# Altium PCB CPU_wireless_shield_v1.0.PcbDoc
Units mm, origin at the board's own origin, x right, y up, seen from the top; angles counter-clockwise.
Board outline 85 x 56 mm, 2 copper layers (Top Layer, Bottom Layer), stack 1.571 mm thick; 46 components, 34 nets, 177 pads, 0 vias.
Unrouted connection lines stored in the file: 71.
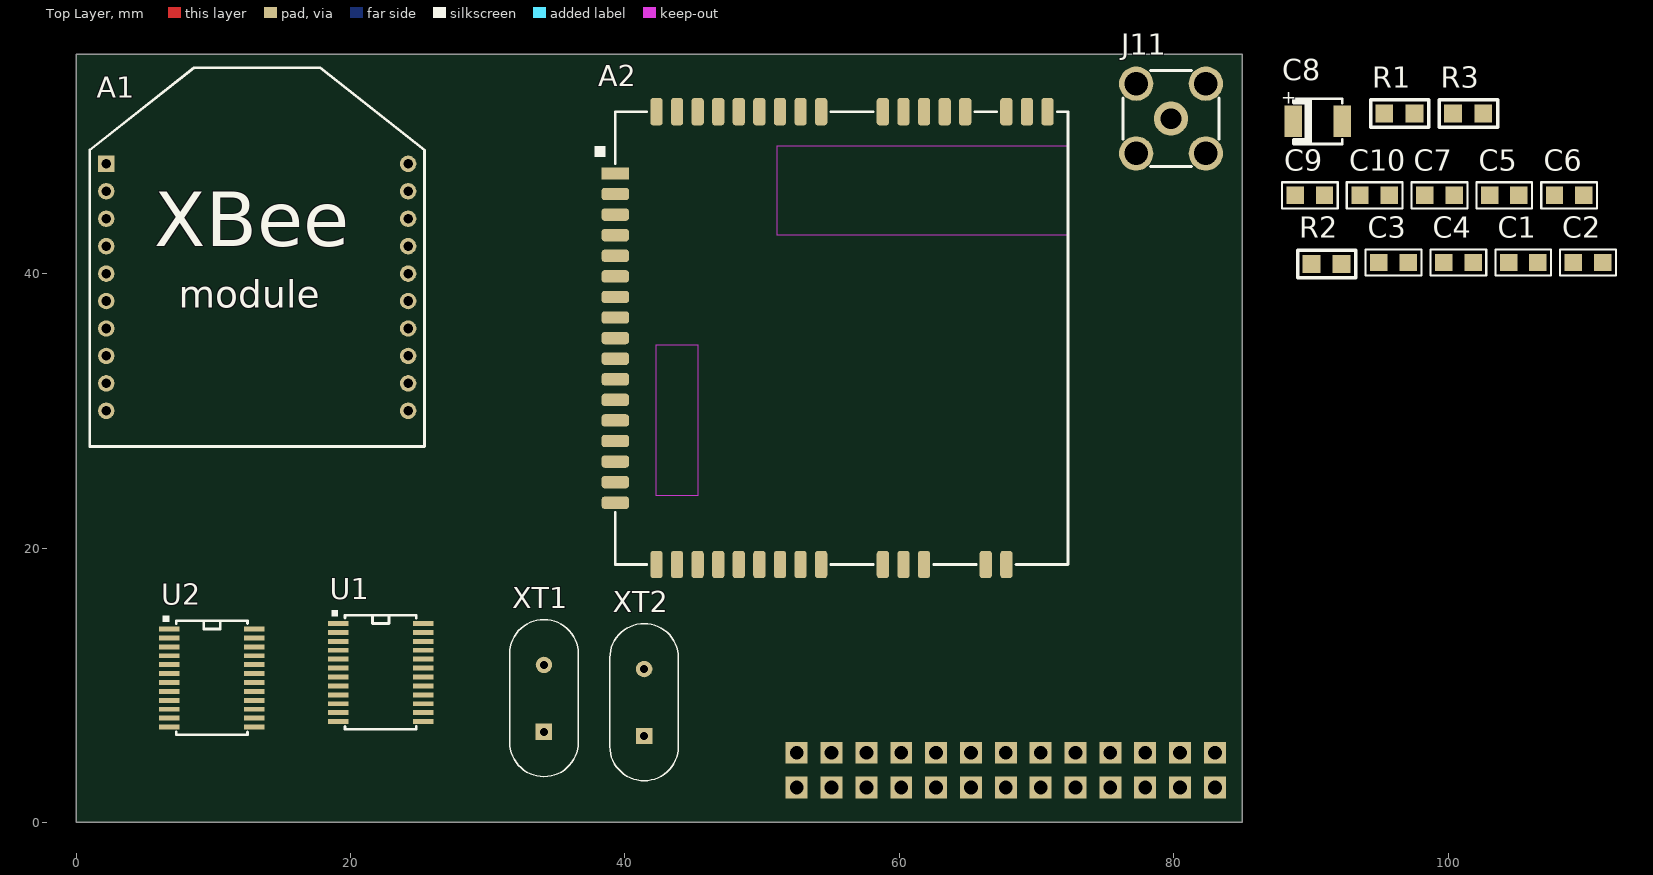
[diagram p0: Top Layer view]
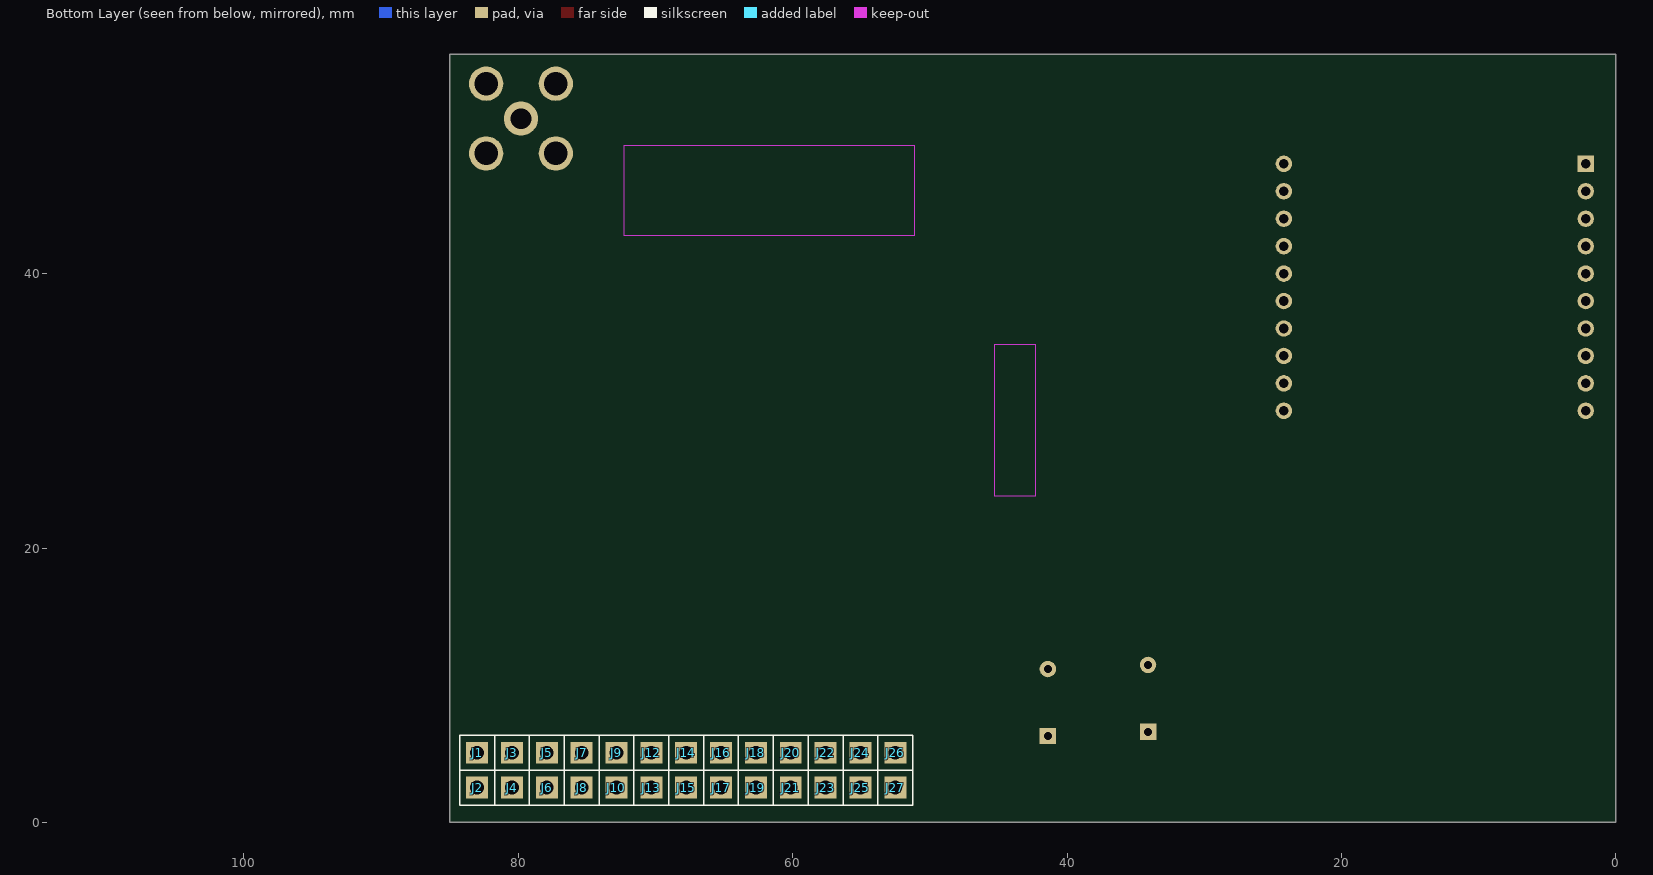
[diagram p1: Bottom Layer view, seen from below]

## Layer stack, top to bottom
Top Layer: signal copper 0.0356
Dielectric: core 1.5, FR-4, Dk 4.8
Bottom Layer: signal copper 0.0356

## Board outline
0,0 0,56 85,56 85,0

## Design rules (kind name [scope] priority, off if disabled: settings)
Clearance [All] p1: gap=0.254
PolygonConnect [All] p1: connectstyle=Relief reliefconductorwidth=0.254 reliefentries=4 polygonreliefangle="90 Angle"
RoutingVias [All] p1: holewidth=0.711 width=1.27 viastyle="Through Hole" minholewidth=0.711 minwidth=1.27 maxholewidth=0.711 maxwidth=1.27
SilkscreenOverComponentPads [All] p1: minsilkscreentomaskgap=0.254
SolderMaskExpansion [All] p1: expansion=0.102
Width [All] p1: maxlimit=0.254 minlimit=0.254 preferedwidth=0.254
27 further rules are at their usual default settings.

## Components (designator, comment, footprint, x,y, rotation, side; value= is the part's Value field where it differs from the comment)
A1 "XBee_RF_module" XBee_module 2.2,48 r0 top
A2 "SIM900D" SIM900D 55.8,35.3 r0 top
C1 "0.1uF" C0805 104.402,40.807 r0 top
C2 "0.1uF" C0805 109.127,40.807 r0 top
C3 "0.1uF" C0805 94.954,40.807 r0 top
C4 "0.1uF" C0805 99.678,40.807 r0 top
C5 "0.1uF" C0805 103.024,45.707 r0 top
C6 "0.1uF" C0805 107.749,45.707 r0 top
C7 "0.1uF" C0805 98.3,45.707 r0 top
C8 "47uF x 10V" SM_C_TANT_B 90.5,51.1 r0 top
C9 "0.1uF" C0805 88.851,45.707 r0 top
C10 "0.1uF" C0805 93.576,45.707 r0 top
J1 "Pin_V2" SOCKET 83,5.08 r180 bottom locked
J2 "Pin_V2" SOCKET 83,2.54 r180 bottom locked
J3 "Pin_V2" SOCKET 80.46,5.08 r180 bottom locked
J4 "Pin_V2" SOCKET 80.46,2.54 r180 bottom locked
J5 "Pin_V2" SOCKET 77.92,5.08 r180 bottom locked
J6 "Pin_V2" SOCKET 77.92,2.54 r180 bottom locked
J7 "Pin_V2" SOCKET 75.38,5.08 r180 bottom locked
J8 "Pin_V2" SOCKET 75.38,2.54 r180 bottom locked
J9 "Pin_V2" SOCKET 72.84,5.08 r180 bottom locked
J10 "Pin_V2" SOCKET 72.84,2.54 r180 bottom locked
J11 "SMA" SMA-J 79.8,51.3 r0 top
J12 "Pin_V2" SOCKET 70.3,5.08 r180 bottom locked
J13 "Pin_V2" SOCKET 70.3,2.54 r180 bottom locked
J14 "Pin_V2" SOCKET 67.76,5.08 r180 bottom locked
J15 "Pin_V2" SOCKET 67.76,2.54 r180 bottom locked
J16 "Pin_V2" SOCKET 65.22,5.08 r180 bottom locked
J17 "Pin_V2" SOCKET 65.22,2.54 r180 bottom locked
J18 "Pin_V2" SOCKET 62.68,5.08 r180 bottom locked
J19 "Pin_V2" SOCKET 62.68,2.54 r180 bottom locked
J20 "Pin_V2" SOCKET 60.14,5.08 r180 bottom locked
J21 "Pin_V2" SOCKET 60.14,2.54 r180 bottom locked
J22 "Pin_V2" SOCKET 57.6,5.08 r180 bottom locked
J23 "Pin_V2" SOCKET 57.6,2.54 r180 bottom locked
J24 "Pin_V2" SOCKET 55.06,5.08 r180 bottom locked
J25 "Pin_V2" SOCKET 55.06,2.54 r180 bottom locked
J26 "Pin_V2" SOCKET 52.52,5.08 r180 bottom locked
J27 "Pin_V2" SOCKET 52.52,2.54 r180 bottom locked
R1 "1k" R0805 95.339,51.657 r0 top
R2 "10k" R0805 90.027,40.709 r0 top
R3 "10k" R0805 100.351,51.657 r0 top
U1 "SC16IS750" TSSOP-24 19.1,14.5 r0 top
U2 "SC16IS750" TSSOP-24 6.8,14.1 r0 top
XT1 "1.8432 MHz" HC-49U/S 34.1,6.6 r90 top
XT2 "1.8432 MHz" HC-49U/S 41.4,6.3 r90 top

## Footprints (in the part's own frame and the unit in brackets; to place one, negate y for a bottom-side part, rotate by r counter-clockwise, add the part's x,y. Pads: shape width x height; smd on the part's side, far side on the other; paste and mask are expansions set on the pad)
C0805 [mil]
  rect 50x50 smd: 1(0,0) 2(84,0)
  silkscreen extent -38,-38 122,38, body extent -2,-27 81,27, height 53
HC-49U/S [mm] "XTAL thru-hole package"
  rect 1.2x1.2 hole 0.6: 1(0,0)
  round 1.2 hole 0.6: 2(4.88,0)
  silkscreen extent -3.26,-2.5 8.19,2.5, body extent -3.26,-2.5 8.14,2.5, height 3.5
R0805 [mm]
  rect 1.3x1.3 smd: 1(0,0) 2(2.2,0)
  silkscreen extent -1,-1 3.25,1, body extent -0.1,-0.7 2.1,0.7, height 0.55
SIM900D [mm]
  rect 2x0.9 smd: 1(-16.5,12)
  rrect50% 2x0.9 smd: 2(-16.5,10.5) 3(-16.5,9) 4(-16.5,7.5) 5(-16.5,6) 6(-16.5,4.5) 7(-16.5,3) 8(-16.5,1.5) 9(-16.5,0) 10(-16.5,-1.5) 11(-16.5,-3) 12(-16.5,-4.5) 13(-16.5,-6) 14(-16.5,-7.5) 15(-16.5,-9) 16(-16.5,-10.5) 17(-16.5,-12)
  rrect50% 0.9x2 smd: 18(-13.5,-16.5) 19(-12,-16.5) 20(-10.5,-16.5) 21(-9,-16.5) 22(-7.5,-16.5) 23(-6,-16.5) 24(-4.5,-16.5) 25(-3,-16.5) 26(-1.5,-16.5) 27(3,-16.5) 28(4.5,-16.5) 29(6,-16.5) 30(10.5,-16.5) 31(12,-16.5) 32(15,16.5) 33(13.5,16.5) 34(12,16.5) 35(9,16.5) 36(7.5,16.5) 37(6,16.5) 38(4.5,16.5) 39(3,16.5) 40(-1.5,16.5) 41(-3,16.5) 42(-4.5,16.5) 43(-6,16.5) 44(-7.5,16.5) 45(-9,16.5) 46(-10.5,16.5) 47(-12,16.5) 48(-13.5,16.5)
  Keep-Out Layer region: -4.7,14 16.5,14 16.5,7.5 -4.7,7.5
  Keep-Out Layer region: -13.5,-0.5 -10.5,-0.5 -10.5,-11.5 -13.5,-11.5
  silkscreen extent -18,-16.5 16.5,16.5, body extent -16.5,-16.5 16.5,16.5, height 3.05
SM_C_TANT_B [mil]
  rect 50x90 smd: 1(-70,0) 2(70,0)
  silkscreen extent -73,-68 70,68, body extent -70,-60 70,60, height 71
SMA-J [mm] "SMA coax. connector"
  round 2.5 hole 1.5: I(0,0)
  round 2.5 hole 1.7: SH(-2.54,-2.54) SH(-2.54,2.54) SH(2.54,-2.54) SH(2.54,2.54)
  silkscreen extent -3.5,-3.5 3.5,3.5, body extent -3.5,-3.5 3.5,3.5, height 8
SOCKET [mm]
  rect 1.6x1.6 hole 1: 1(0,0)
  silkscreen extent -1.27,-1.27 1.27,1.27, body extent -1.27,-1.27 1.27,1.27, height 8.5
TSSOP-24 [mm]
  rect 1.5x0.36 smd: 1(0,0) 2(0,-0.65) 3(0,-1.3) 4(0,-1.95) 5(0,-2.6) 6(0,-3.25) 7(0,-3.9) 8(0,-4.55) 9(0,-5.2) 10(0,-5.85) 11(0,-6.5) 12(0,-7.15) 13(6.2,-7.15) 14(6.2,-6.5) 15(6.2,-5.85) 16(6.2,-5.2) 17(6.2,-4.55) 18(6.2,-3.9) 19(6.2,-3.25) 20(6.2,-2.6) 21(6.2,-1.95) 22(6.2,-1.3) 23(6.2,-0.65) 24(6.2,0)
  silkscreen extent -0.5,-7.7 5.7,1, body extent -0.07,-7.47 6.33,0.33, height 1.05
XBee_module [mm]
  rect 1.2x1.2 hole 0.7: 1(0,0)
  round 1.2 hole 0.7: 2(0,-2) 3(0,-4) 4(0,-6) 5(0,-8) 6(0,-10) 7(0,-12) 8(0,-14) 9(0,-16) 10(0,-18) 11(22,-18) 12(22,-16) 13(22,-14) 14(22,-12) 15(22,-10) 16(22,-8) 17(22,-6) 18(22,-4) 19(22,-2) 20(22,0)
  silkscreen extent -1.2,-20.6 23.2,7, body extent -1.2,-19 23.2,1, height 4.3

## Part data
C1 C2 C3 C4 C5 C6 C7 C9 C10: library part C0805
C8: library part CAP_pol
J1 J2 J3 J4 J5 J6 J7 J8 J9 J10 J12 J13 J14 J15 J16 J17 J18 J19 J20 J21 J22 J23 J24 J25 J26 J27: library part Pin_1
J11: library part SMA-J
R1 R2 R3: library part RES_SMD
XT1 XT2: library part XTAL

## Nets (pads, with @x,y where several pads share a name; then routed paths per layer and width w, separated by ;. In a path a pad name is that pad's centre, name@x,y a point inside that pad or via, vN(x,y) a via of type N, cw(c..) or ccw(c..) an arc to the next point about the centre after c; other vN are vias at no path point)
ADC_REF: A1.14
C\S\_\G\S\M\: U2.9
C\S\_\X\B\E\E\: U1.9
G\S\M\_\I\R\Q\: R3.1 U2.14
G\S\M\_\R\S\T\: U2.4
GND: A1.10 A2.17 A2.22 A2.30 A2.31 A2.32 A2.34 A2.35 A2.36 A2.37 A2.48 C1.1 C2.1 C3.2 C4.2 C5.1 C6.1 C7.2 C8.2 C9.2 C10.2 J6.1 J9.1 J11.SH J15.1 J21.1 J26.1 U1.8 U1.19 U2.19
GSM_ANT: A2.33 J11.I
GSM_CTS: A2.45 U2.24
GSM_NET_LED: A2.41
GSM_PKEY: A2.12
GSM_RTS: A2.44 U2.1
GSM_RX: A2.3 R2.1 U2.2
GSM_STS_LED: A2.5
GSM_TX: A2.4 U2.3
MISO: U1.11 U2.11
MOSI: U1.10 U2.10
NetA2_15: A2.15 C8.1
NetC1_2: C1.2 U1.5 XT1.2
NetC2_2: C2.2 U1.6 XT1.1
NetC5_2: C5.2 U2.5 XT2.2
NetC6_2: C6.2 U2.6 XT2.1
SCLK: U1.12 U2.12
SIM_CLK: A2.7
SIM_DATA: A2.6
SIM_RST: A2.8
SIM_VCC: A2.9
U_TEMP: A1.20
VCC: A1.1 A2.38 A2.39 C3.1 C4.1 C7.1 C9.1 C10.1 J1.1 J18.1 R1.2 R2.2 R3.2 U1.7 U2.7
X\B\E\E\_\I\R\Q\: R1.1 U1.14
X\B\E\E\_\R\S\T\: A1.5 U1.4
XBEE_CTS: A1.12 U1.24
XBEE_RTS: A1.16 U1.1
XBEE_RX: A1.3 U1.2
XBEE_TX: A1.2 U1.3
pads on no net: A1.4 A1.6 A1.7 A1.8 A1.9 A1.11 A1.13 A1.15 A1.17 A1.18 A1.19 A2.1 A2.2 A2.10 A2.11 A2.13 A2.14 A2.16 A2.18 A2.19 A2.20 A2.21 A2.23 A2.24 A2.25 A2.26 A2.27 A2.28 A2.29 A2.40 A2.42 A2.43 A2.46 A2.47 J2.1 J3.1 J4.1 J5.1 J7.1 J8.1 J10.1 J12.1 J13.1 J14.1 J16.1 J17.1 J19.1 J20.1 J22.1 J23.1 J24.1 J25.1 J27.1 U1.13 U1.15 U1.16 U1.17 U1.18 U1.20 U1.21 U1.22 U1.23 U2.8 U2.13 U2.15 U2.16 U2.17 U2.18 U2.20 U2.21 U2.22 U2.23

## Text inside footprints (layer, text, board x,y; h text height)
A1: Top Overlay "XBee" at 5.7,42 h4; Top Overlay "module" at 7.5,37.5 h2
C8: Top Overlay "+" at 87.833,52.37 h0.95; Mechanical 3 "JK" at 87.96,50.338 h0.95